# Altium PCB PCB1.PcbDoc
Units mm, origin at the board's own origin, x right, y up, seen from the top; angles counter-clockwise.
Board outline 152.4 x 101.6 mm, 2 copper layers (Top Layer, Bottom Layer); 50 components, 36 nets, 158 pads, 20 vias.
Unrouted connection lines stored in the file: 1.
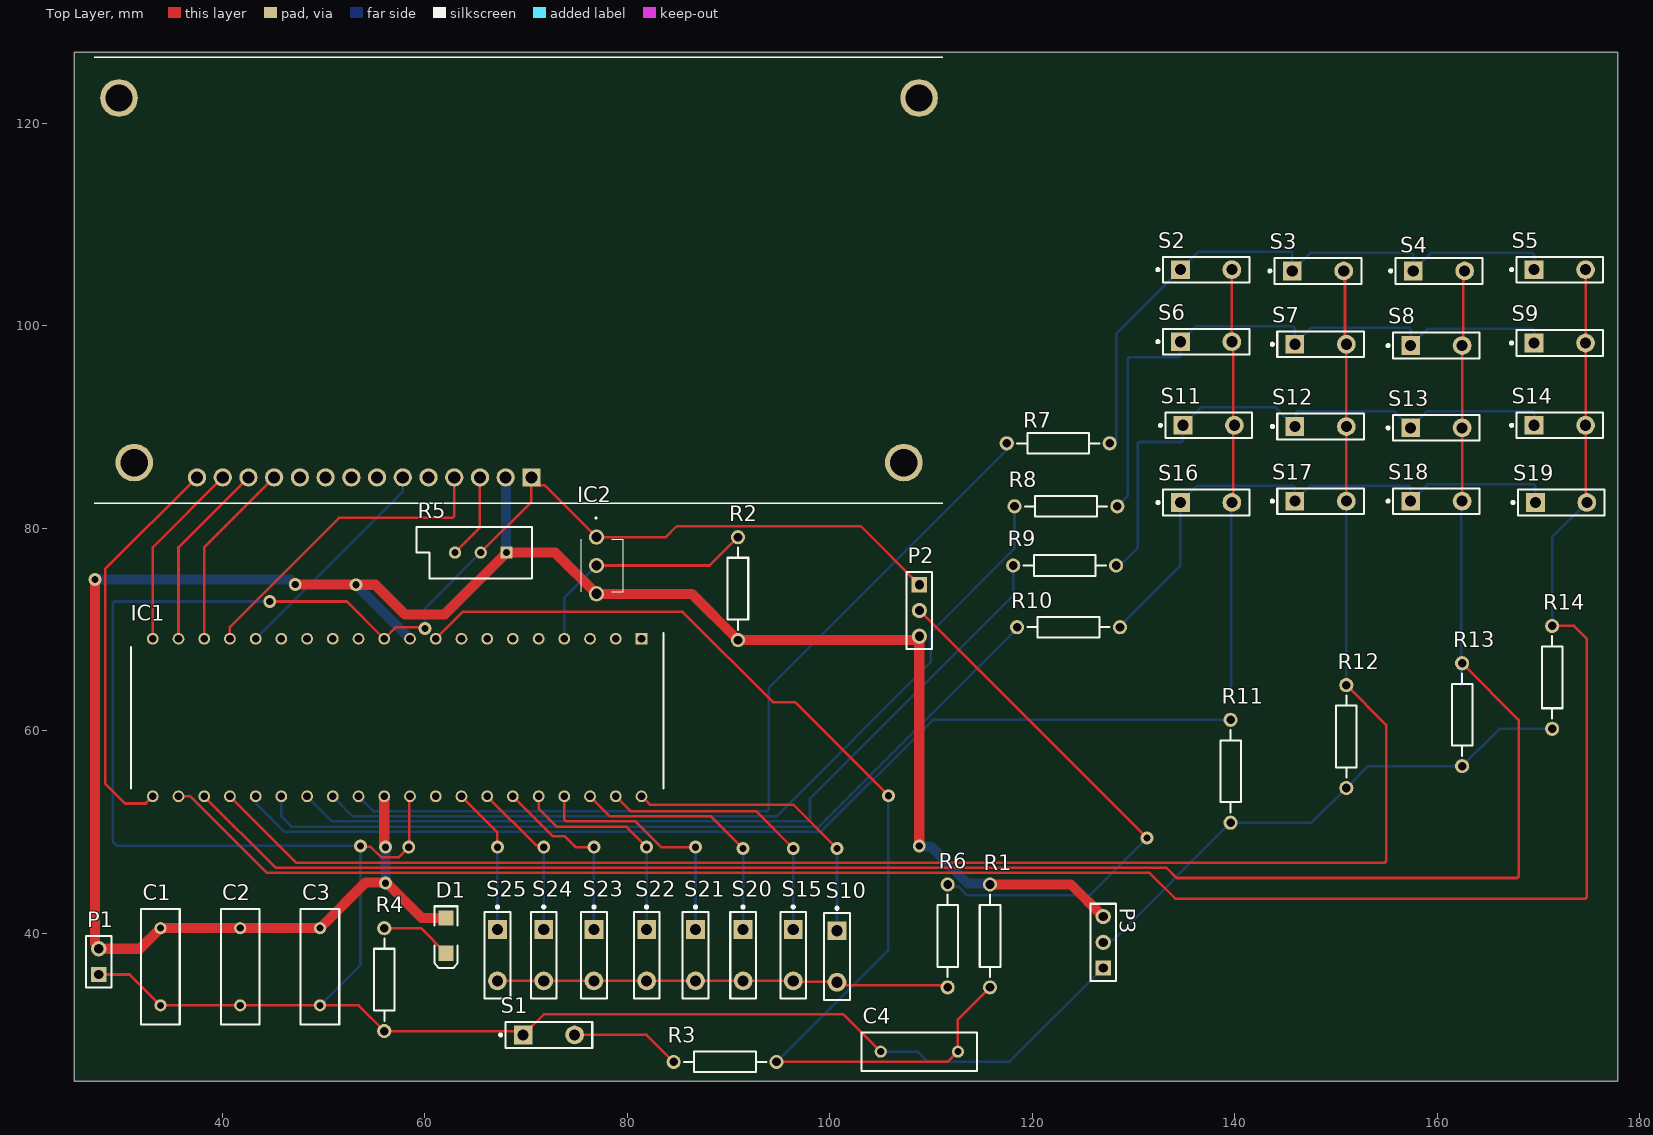
[diagram p0: Top Layer view]
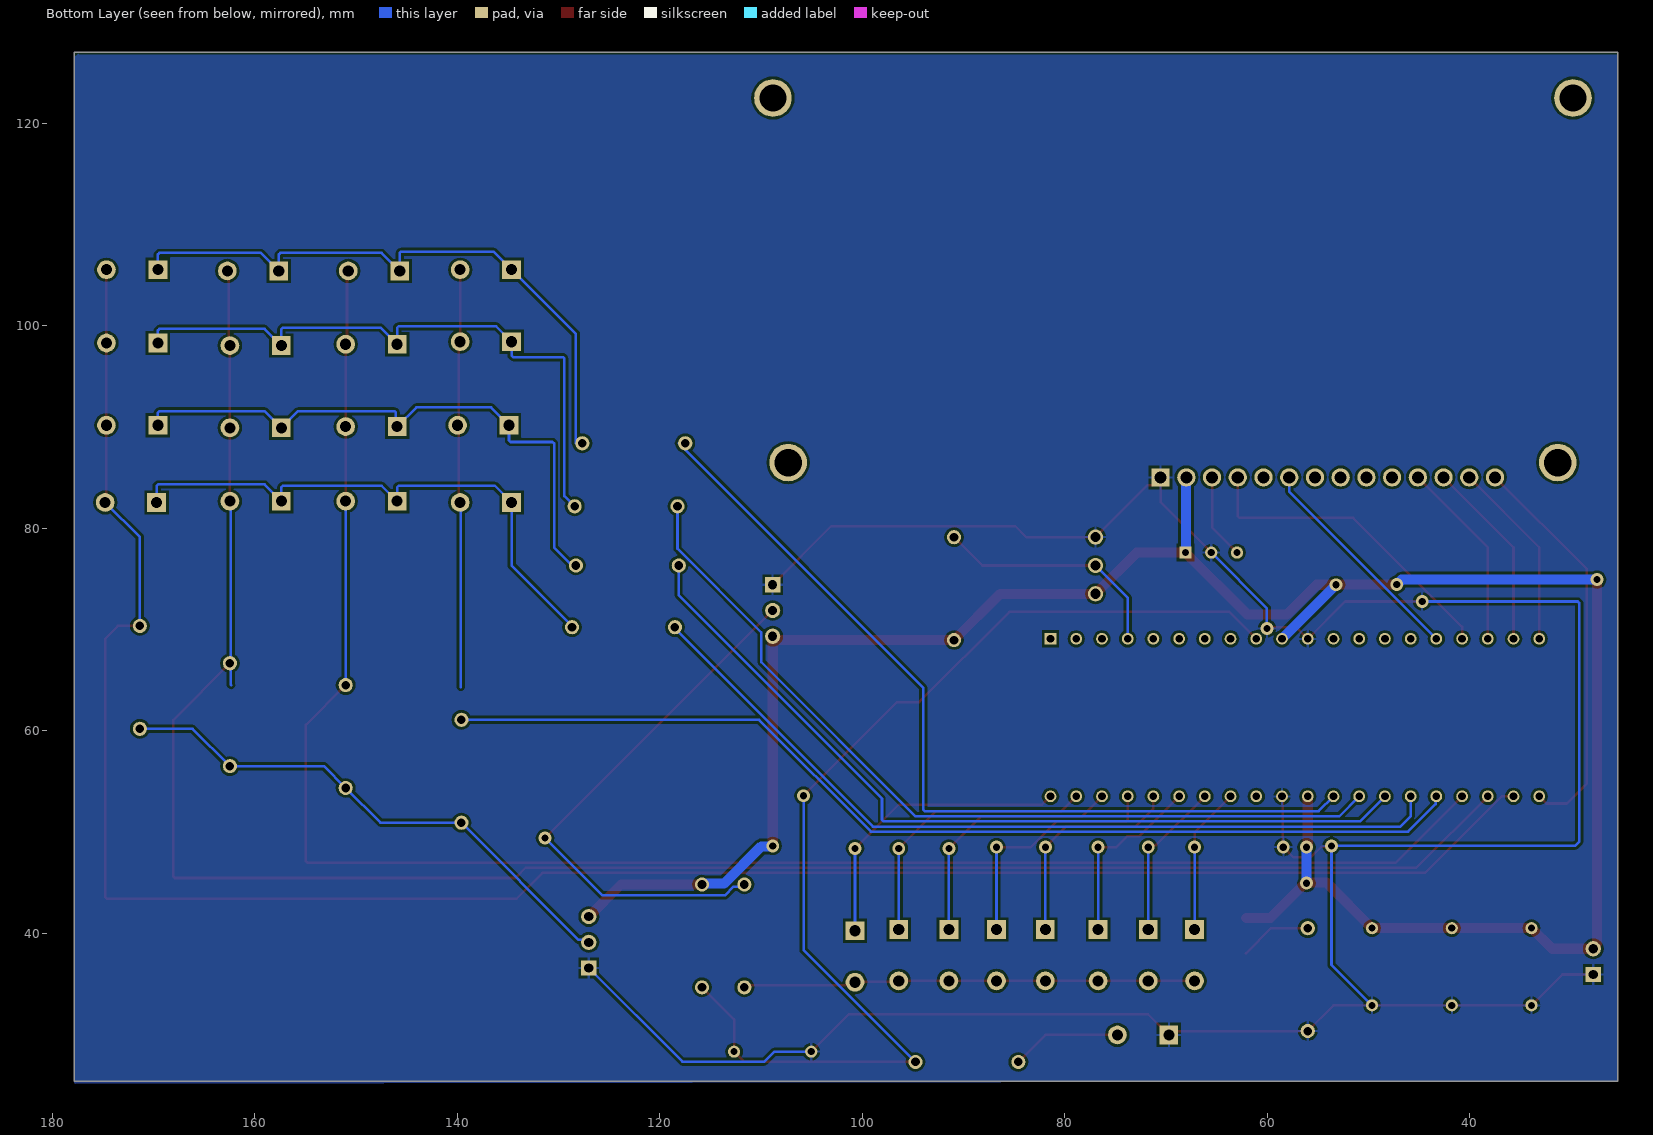
[diagram p1: Bottom Layer view, seen from below]

## Layer stack, top to bottom
Top Solder: solder mask 0.0102, Solder Resist, Dk 3.5
Top Layer: signal copper 0.0356
Dielectric 1: dielectric 0.32, FR-4, Dk 4.8
Bottom Layer: signal copper 0.0356
Bottom Solder: solder mask 0.0102, Solder Resist, Dk 3.5

## Board outline
25.4,25.4 177.8,25.4 177.8,127 25.4,127

## Design rules (kind name [scope] priority, off if disabled: settings)
Clearance [All] p1: gap=0.254 ignorepadtopadclearanceinfootprint=FALSE except(0: Arc-Hole Track-Hole SMDPad-Hole THPad-Hole Via-Hole Fill-Hole Poly-Hole Region-Hole Text-Hole)
PolygonConnect [All] p1: connectstyle=Relief reliefconductorwidth=0.254 reliefentries=4 polygonreliefangle="90 Angle" airgapwidth=0.254
RoutingVias [All] p1: holewidth=0.711 width=1.27 viastyle="Through Hole" minholewidth=0.711 minwidth=1.27 maxholewidth=0.711 maxwidth=1.27
SolderMaskExpansion [All] p1: expansion=0.102 istentingtop=FALSE
Width vcc [InNet('VCC')] p1: maxlimit=1 minlimit=1 preferedwidth=1
Width [All] p2: maxlimit=0.254 minlimit=0.254 preferedwidth=0.254
30 further rules are at their usual default settings.

## Classes and differential pairs
component class ATMEGA16L-8PI: C1 C2 C3 C4 D1 IC1 IC2 P1 P2 R1 R2 R3 R4 R5 R6 R7 R8 R9 R10 R12 R13 R14 S1 S2 S3 S4 S5 S6 S7 S8 S9 S10 S11 S12 S13 S14 S15 S16 S17 S18 S19 S20 S21 S22 S23 S24 S25

## Components (designator, comment, footprint, x,y, rotation, side; value= is the part's Value field where it differs from the comment)
C1 "Cap" RAD-0.3 33.909,36.703 r90 top value=100pF
C2 "Cap" RAD-0.3 41.783,36.703 r90 top value=100pF
C3 "Cap" RAD-0.3 49.657,36.703 r90 top value=100pF
C4 "Cap" RAD-0.3 108.839,28.321 r0 top value=100pF
D1 "LED2" 3.2X1.6X1.1 62.103,39.779 r270 top
DS1 "LM016L" LCD_LM016L 70.535,85.027 r0 top
IC1 "ATMEGA16L-8PI" DIP1556W56P254L5232H483Q40N 57.277,61.309 r270 top
IC2 "DS18B20+T&R" DS18B20TR 76.962,79.127 r270 top
P1 "Header 2" HDR1X2 27.813,35.941 r90 top
P2 "Header 3" HDR1X3 108.839,74.422 r270 top
P3 "Header 3" HDR1X3 127,36.576 r90 top
R1 "Res2" AXIAL-0.4 115.824,39.751 r90 top value=1K
R2 "Res2" AXIAL-0.4 90.932,74.041 r270 top value=1K
R3 "Res2" AXIAL-0.4 89.662,27.305 r180 top value=1K
R4 "Res2" AXIAL-0.4 56.007,35.433 r270 top value=1K
R5 "RPot" VR5 65.532,77.597 r180 top value=1K
R6 "Res2" AXIAL-0.4 111.633,39.751 r90 top value=1K
R7 "Res2" AXIAL-0.4 122.555,88.392 r180 top value=1K
R8 "Res2" AXIAL-0.4 123.317,82.169 r180 top value=1K
R9 "Res2" AXIAL-0.4 123.19,76.327 r180 top value=1K
R10 "Res2" AXIAL-0.4 123.571,70.231 r180 top value=1K
R11 "Res2" AXIAL-0.4 139.573,56.007 r90 top value=1K
R12 "Res2" AXIAL-0.4 151.003,59.436 r90 top value=1K
R13 "Res2" AXIAL-0.4 162.433,61.595 r90 top value=1K
R14 "Res2" AXIAL-0.4 171.323,65.278 r90 top value=1K
S1 "SW-PB" SPST-2 72.263,29.972 r0 top
S2 "SW-PB" SPST-2 137.16,105.537 r0 top
S3 "SW-PB" SPST-2 148.209,105.41 r0 top
S4 "SW-PB" SPST-2 160.147,105.41 r0 top
S5 "SW-PB" SPST-2 172.085,105.537 r0 top
S6 "SW-PB" SPST-2 137.16,98.425 r0 top
S7 "SW-PB" SPST-2 148.463,98.171 r0 top
S8 "SW-PB" SPST-2 159.893,98.044 r0 top
S9 "SW-PB" SPST-2 172.085,98.298 r0 top
S10 "SW-PB" SPST-2 100.711,37.719 r270 top
S11 "SW-PB" SPST-2 137.414,90.17 r0 top
S12 "SW-PB" SPST-2 148.463,90.043 r0 top
S13 "SW-PB" SPST-2 159.893,89.916 r0 top
S14 "SW-PB" SPST-2 172.085,90.17 r0 top
S15 "SW-PB" SPST-2 96.393,37.846 r270 top
S16 "SW-PB" SPST-2 137.16,82.55 r0 top
S17 "SW-PB" SPST-2 148.463,82.677 r0 top
S18 "SW-PB" SPST-2 159.893,82.677 r0 top
S19 "SW-PB" SPST-2 172.212,82.55 r0 top
S20 "SW-PB" SPST-2 91.44,37.846 r270 top
S21 "SW-PB" SPST-2 86.741,37.846 r270 top
S22 "SW-PB" SPST-2 81.915,37.846 r270 top
S23 "SW-PB" SPST-2 76.708,37.846 r270 top
S24 "SW-PB" SPST-2 71.755,37.846 r270 top
S25 "SW-PB" SPST-2 67.183,37.846 r270 top

## Footprints (in the part's own frame and the unit in brackets; to place one, negate y for a bottom-side part, rotate by r counter-clockwise, add the part's x,y. Pads: shape width x height; smd on the part's side, far side on the other; paste and mask are expansions set on the pad)
3.2X1.6X1.1 [mm] "SMT LED; 2 Flat Leads"
  rect 1.5x1.5 smd: 1(-1.75,0) 2(1.75,0)
  silkscreen extent -2.9,-1.15 3.2,1.15
AXIAL-0.4 [mm] "Axial Device, Thru-Hole; 2 Leads; 0.4 in Pin Spacing"
  round 1.4 hole 0.85: 1(-5.08,0) 2(5.08,0)
  silkscreen extent -4.06,-1.02 4.06,1.02
DIP1556W56P254L5232H483Q40N [mm]
  rect 1.159x1.159 hole 0.759: 1(-7.779,24.13)
  round 1.159 hole 0.759: 2(-7.779,21.59) 3(-7.779,19.05) 4(-7.779,16.51) 5(-7.779,13.97) 6(-7.779,11.43) 7(-7.779,8.89) 8(-7.779,6.35) 9(-7.779,3.81) 10(-7.779,1.27) 11(-7.779,-1.27) 12(-7.779,-3.81) 13(-7.779,-6.35) 14(-7.779,-8.89) 15(-7.779,-11.43) 16(-7.779,-13.97) 17(-7.779,-16.51) 18(-7.779,-19.05) 19(-7.779,-21.59) 20(-7.779,-24.13) 21(7.779,-24.13) 22(7.779,-21.59) 23(7.779,-19.05) 24(7.779,-16.51) 25(7.779,-13.97) 26(7.779,-11.43) 27(7.779,-8.89) 28(7.779,-6.35) 29(7.779,-3.81) 30(7.779,-1.27) 31(7.779,1.27) 32(7.779,3.81) 33(7.779,6.35) 34(7.779,8.89) 35(7.779,11.43) 36(7.779,13.97) 37(7.779,16.51) 38(7.779,19.05) 39(7.779,21.59) 40(7.779,24.13)
  silkscreen extent -8.36,-26.29 6.99,26.29, body extent -7.92,-26.16 7.92,26.16, height 4.83
DS18B20TR [mm]
  round 1.512 hole 1.008: 1(0,0) 2(2.8,0) 3(5.6,0)
  silkscreen extent -1.95,-1.5 5.41,2.66, body extent -0.4,-1.53 6,2.66, height 10.51
HDR1X2 [mm] "Connector; Header; 2 Position"
  rect 1.5x1.5 hole 0.9: 1(0,0)
  round 1.5 hole 0.9: 2(2.54,0)
  silkscreen extent -1.27,-1.27 3.81,1.27
HDR1X3 [mm] "Connector; Header; 3 Position"
  rect 1.5x1.5 hole 0.9: 1(0,0)
  round 1.5 hole 0.9: 2(2.54,0) 3(5.08,0)
  silkscreen extent -1.27,-1.27 6.35,1.27
LCD_LM016L [mm]
  rect 1.8x1.8 hole 1.2: 1(0,0)
  round 1.8 hole 1.2: 2(-2.54,0) 3(-5.08,0) 4(-7.62,0) 5(-10.16,0) 6(-12.7,0) 7(-15.24,0) 8(-17.78,0) 9(-20.32,0) 10(-22.86,0) 11(-25.4,0) 12(-27.94,0) 13(-30.48,0) 14(-33.02,0)
  round 3.716 hole 2.7: 15(36.78,1.46) 16(-39.22,1.46) 17(-40.72,37.46) 18(38.28,37.46)
  silkscreen extent -43.18,-2.54 40.64,41.46
RAD-0.3 [mm] "Radial Cap, Thru-Hole; 2 Leads; 0.3 in Pin Spacing"
  round 1.2 hole 0.7: 1(-3.81,0) 2(3.81,0)
  silkscreen extent -5.71,-1.91 5.71,1.91
SPST-2 [mm] "Switch; 2 Leads"
  rect 1.85x1.85 hole 1.1: 1(-2.54,0)
  round 1.85 hole 1.1: 2(2.54,0)
  silkscreen extent -4.89,-1.27 4.28,1.27
VR5 [mm] "Thru-Hole; 3 Leads"
  rect 1.2x1.2 hole 0.7: 1(-2.54,0)
  round 1.2 hole 0.7: 2(0,0) 3(2.54,0)
  silkscreen extent -5.08,-2.54 6.35,2.54

## Part data
C1 C2 C3 C4: "Capacitor", LatestRevisionDate=17-Jul-2002, LatestRevisionNote="Re-released for DXP Platform.", PackageDescription="Radial Cap, Thru-Hole; 2 Leads; 0.3 in Pin Spacing", PackageReference=RAD-0.3, Published=8-Jun-2000, Publisher="Altium Limited"
D1: "Typical RED, GREEN, YELLOW, AMBER GaAs LED", LatestRevisionDate=17-Jul-2002, LatestRevisionNote="Re-released for DXP Platform.", PackageDescription="SM LED; 2 Flat Leads", PackageReference=3.2X1.6X1.1, PackageVersion=Feb-2002, Published=8-Jun-2000, Publisher="Altium Limited"
DS1: "Display Lcd 35x75mm", Package=None, Availability=Unavailable, MF=Hitachi, MP=LM016L, Price=None, SnapEDA_Link=https://www.snapeda.com/parts/LM016L/Hitachi/view-part/229734/?ref=snap
IC1: "Integrated Circuit", Manufacturer_Name=Microchip, Mouser Part Number=556-ATMEGA16L-8PI, Datasheet Link=http://www.microchip.com/mymicrochip/filehandler.aspx?ddocname=en590660, Height=4.826mm, Manufacturer_Part_Number=ATMEGA16L-8PI, Mouser Price/Stock=https://www.mouser.co.uk/ProductDetail/Microchip-Technology-Atmel/ATmega16L-8PI?qs=aqrrBurbvGfoTGm9tGS2ew%3D%3D
IC2: "Integrated Circuit", Manufacturer_Name="Maxim Integrated", Mouser Part Number=700-DS18B20T&R, Datasheet Link=https://componentsearchengine.com/Datasheets/1/DS18B20+T&R.pdf, Height=10.41mm, Manufacturer_Part_Number=DS18B20+T&R, Mouser Price/Stock=https://www.mouser.co.uk/ProductDetail/Maxim-Integrated/DS18B20%2bTR?qs=7H2Jq%252ByxpJKpIDCbiq4lfg%3D%3D
P1: "Header, 2-Pin", LatestRevisionDate=17-Jul-2002, LatestRevisionNote="Re-released for DXP Platform.", Publisher="Altium Limited"
P2 P3: "Header, 3-Pin", LatestRevisionDate=17-Jul-2002, LatestRevisionNote="Re-released for DXP Platform.", Publisher="Altium Limited"
R1 R2 R3 R4 R6 R7 R8 R9 R10 R11 R12 R13 R14: "Resistor", LatestRevisionDate=17-Jul-2002, LatestRevisionNote="Re-released for DXP Platform.", PackageDescription="Axial Device, Thru-Hole; 2 Leads; 0.4 in Pin Spacing", PackageReference=AXIAL-0.4, Published=8-Jun-2000, Publisher="Altium Limited"
R5: "Potentiometer", LatestRevisionDate=17-Jul-2002, LatestRevisionNote="Re-released for DXP Platform.", PackageDescription="Variable Resistor, Thru-Hole; 3 Leads", PackageReference=VR5, Published=8-Jun-2000, Publisher="Altium Limited", Set Position=0.5, Sim Note="Enter the Resistance value and the set point into parameter fields."
S1 S2 S3 S4 S5 S6 S7 S8 S9 S10 S11 S12 S13 S14 S15 S16 S17 S18 S19 S20 S21 S22 S23 S24 S25: "Switch", LatestRevisionDate=17-Jul-2002, LatestRevisionNote="Re-released for DXP Platform.", PackageDescription="Switch; 2 Leads", PackageReference=SPST-2, Published=24-Mar-1999, Publisher="Altium Limited"

## Via types
v1: diameter 1.27, hole 0.711, Top Layer to Bottom Layer, 20 vias

## Nets (pads, with @x,y where several pads share a name; then routed paths per layer and width w, separated by ;. In a path a pad name is that pad's centre, name@x,y a point inside that pad or via, vN(x,y) a via of type N, cw(c..) or ccw(c..) an arc to the next point about the centre after c; other vN are vias at no path point)
GND: C1.1 C2.1 C3.1 C4.1 DS1.1 IC1.11 IC1.31 IC2.1 P1.1 P2.1 P3.1 R4.2 R5.2 S1.1 | length 280.6
  Top Layer w0.254: P1.1 30.861,35.941 C1.1 C2.1 C3.1 53.467,32.893 R4.2 69.342,30.353 S1.1 71.755,32.004 101.346,32.004 C4.1 ; v1(44.704,72.771) 52.324,72.771 IC1.11 57.15,70.231 59.915,70.231 v1(60.034,70.112) ; v1(53.658,48.641) 53.762,48.537 54.674,48.537 55.713,47.498 57.404,47.498 v1(58.42,48.514) 58.483,48.578 58.483,53.467 IC1.31 ; R5.2 70.535,82.6 DS1.1 71.308,84.254 71.835,84.254 IC2.1 83.804,79.127 84.879,80.202 103.059,80.202 P2.1
  Bottom Layer w0.254: v1(44.704,72.771) 44.577,72.898 44.323,72.644 44.323,72.683 44.235,72.771 29.359,72.771 29.21,72.622 29.21,49.044 29.613,48.641 v1(53.658,48.641) 53.658,36.894 C3.1 ; v1(60.034,70.112) 60.034,72.099 R5.2 ; C4.1 108.68,28.321 109.661,27.34 117.764,27.34 P3.1
NetD1_2: D1.2 R4.1 | length 7.1
  Top Layer w0.254: R4.1 59.619,40.513 D1.2
NetDS1_3: DS1.3 R5.3 | length 8.5
  Top Layer w0.254: R5.3 65.455,80.06 DS1.3
NetP2_2: P2.2 R6.2 | length 54.3
  Top Layer w0.254: P2.2 v1(131.318,49.403)
  Bottom Layer w0.254: R6.2 111.852,44.612 112.689,44.612 113.551,43.75 125.665,43.75 v1(131.318,49.403)
NetP3_2: P3.2 R11.1 R12.1 R13.1 R14.1 | length 53.1
  Bottom Layer w0.254: P3.2 127.238,39.354 128,39.354 R11.1 147.574,50.927 R12.1 153.162,56.515 R13.1 166.116,60.198 R14.1
NetR3_2: R3.2 S1.2 | length 10.9
  Top Layer w0.254: S1.2 81.915,29.972 R3.2
NetR6_1: R6.1 S10.2 S15.2 S20.2 S21.2 S22.2 S23.2 S24.2 S25.2 | length 44.7
  Top Layer w0.254: S25.2 S24.2 S23.2 S22.2 S21.2 S20.2 S15.2 96.456,35.242 100.647,35.242 S10.2 101,34.89 111.414,34.89 R6.1
NetR7_1: R7.1 S2.1 S3.1 S4.1 S5.1 | length 62
  Bottom Layer w0.254: R7.1@128.27,88.392 128.27,99.187 S2.1 136.398,107.315 145.52,107.315 145.669,107.166 S3.1 147.447,107.188 157.458,107.188 157.607,107.039 S4.1 159.385,107.188 169.396,107.188 169.545,107.039 S5.1
NetR8_1: R8.1 S6.1 S7.1 S8.1 S9.1 | length 63.3
  Bottom Layer w0.254: R8.1 129.413,83.185 129.413,96.752 129.562,96.901 134.471,96.901 134.62,97.05 S6.1 136.144,99.949 145.774,99.949 145.923,99.8 S7.1 147.574,99.822 157.204,99.822 157.353,99.673 S8.1 159.004,99.695 169.396,99.695 169.545,99.546 S9.1
NetR9_1: R9.1 S11.1 S12.1 S13.1 S14.1 | length 59.1
  Bottom Layer w0.254: R9.1@128.651,76.327 130.429,78.105 130.429,88.37 130.578,88.519 134.725,88.519 134.874,88.668 S11.1 136.652,91.948 144.018,91.948 S12.1 146.05,90.17 146.05,91.418 146.199,91.567 155.702,91.567 S13.1 159.004,91.567 169.396,91.567 169.545,91.418 S14.1
NetR10_1: R10.1 S16.1 S17.1 S18.1 S19.1 | length 55.3
  Bottom Layer w0.254: R10.1@128.905,70.612 134.62,76.327 S16.1 136.271,84.201 145.774,84.201 145.923,84.052 S17.1 147.447,84.201 157.204,84.201 157.353,84.052 S18.1 159.004,84.328 169.523,84.328 169.672,84.179 169.672,83.312 S19.1@169.545,83.185
PA0: IC1.40 S10.1 | length 29.6
  Top Layer w0.254: IC1.40 82.232,52.705 96.393,52.705 v1(100.711,48.387)
  Bottom Layer w0.254: S10.1 v1(100.711,48.387)
PA1: IC1.39 S15.1 | length 27.7
  Top Layer w0.254: IC1.39 80.327,52.07 92.71,52.07 v1(96.393,48.387)
  Bottom Layer w0.254: S15.1 v1(96.393,48.387)
PA2: IC1.38 S20.1 | length 25.2
  Top Layer w0.254: IC1.38 78.295,51.562 88.265,51.562 v1(91.44,48.387)
  Bottom Layer w0.254: S20.1 v1(91.44,48.387)
PA3: IC1.37 S21.1 | length 24.5
  Top Layer w0.254: IC1.37 73.787,51.203 73.936,51.054 80.812,51.054 83.352,48.514 v1(86.741,48.514)
  Bottom Layer w0.254: S21.1 v1(86.741,48.514)
PA4: IC1.36 S22.1 | length 21.6
  Top Layer w0.254: IC1.36 71.247,52.324 73.025,50.546 79.883,50.546 v1(81.915,48.514)
  Bottom Layer w0.254: S22.1 v1(81.915,48.514)
PA5: IC1.35 S23.1 | length 18.2
  Top Layer w0.254: IC1.35 71.915,50.322 72.635,49.602 73.816,49.602 74.905,48.514 v1(76.708,48.514)
  Bottom Layer w0.254: S23.1 v1(76.708,48.514)
PA6: IC1.34 S24.1 | length 15.8
  Top Layer w0.254: IC1.34 70.989,48.708 71.561,48.708 v1(71.755,48.514)
  Bottom Layer w0.254: S24.1 v1(71.755,48.514)
PA7: IC1.33 S25.1 | length 14.6
  Top Layer w0.254: IC1.33 67.183,49.974 v1(67.183,48.514)
  Bottom Layer w0.254: S25.1 v1(67.183,48.514)
PB3: IC1.4 IC2.2 R2.1 | length 23.7
  Top Layer w0.254: IC2.2 88.138,76.327 R2.1
  Bottom Layer w0.254: IC1.4 73.787,73.152 IC2.2
PC0: IC1.22 R14.2 S5.2 S9.2 S14.2 S19.2 | length 208.7
  Top Layer w0.254: IC1.22 36.869,53.53 44.425,45.974 131.572,45.974 134.112,43.434 174.603,43.434 174.752,43.583 174.752,69.088 173.482,70.358 R14.2 ; S19.2@174.625,83.185 S14.2 S9.2 S5.2
  Bottom Layer w0.254: R14.2 171.323,79.121 S19.2
PC1: IC1.23 R13.2 S4.2 S8.2 S13.2 S18.2 | length 197.8
  Top Layer w0.254: IC1.23 45.275,46.482 133.223,46.482 134.239,45.466 167.872,45.466 168.021,45.615 168.021,61.087 R13.2 ; R13.2@162.306,66.294 R13.2@162.369,66.358 ; S18.2@162.369,82.614 S18.2 S13.2 S8.2 162.56,98.171 162.56,105.283 S4.2
  Bottom Layer w0.254: 162.306,64.516 162.369,64.579 162.369,82.614 S18.2
PC2: IC1.24 R12.2 S3.2 S7.2 S12.2 S17.2 | length 177
  Top Layer w0.254: IC1.24 47.307,46.99 154.791,46.99 154.94,47.139 154.94,60.579 R12.2 ; S3.2 150.876,105.283 150.876,98.298 S7.2 S12.2 S17.2
  Bottom Layer w0.254: R12.2 S17.2
PC3: IC1.25 R11.2 S2.2 S6.2 S11.2 S16.2 | length 144.3
  Top Layer w0.254: S16.2@139.636,82.486 S16.2 139.827,82.677 139.827,90.043 S11.2 139.827,90.297 139.827,98.298 S6.2 S2.2
  Bottom Layer w0.254: IC1.25 43.383,53.454 43.383,52.756 46.101,50.038 99.143,50.038 110.192,61.087 R11.2 ; R11.2@139.573,60.706 R11.2@139.636,60.77 ; 139.636,64.325 139.636,82.486 S16.2
PC4: IC1.26 R10.2 | length 83.5
  Bottom Layer w0.254: IC1.26 45.847,51.562 46.863,50.546 98.933,50.546 R10.2@118.745,70.358
PC5: IC1.27 R9.2 | length 84.2
  Bottom Layer w0.254: IC1.27 50.863,51.054 97.895,51.054 98.044,51.203 98.044,53.312 118.11,73.378 R9.2
PC6: IC1.28 R8.2 | length 85
  Bottom Layer w0.254: IC1.28 52.895,51.562 94.742,51.562 109.97,66.79 109.97,69.716 118.237,77.983 R8.2
PC7: IC1.29 R7.2 | length 87.3
  Bottom Layer w0.254: IC1.29 54.927,52.07 93.831,52.07 93.98,52.219 93.98,64.262 R7.2@118.11,88.392
PD2: DS1.6 IC1.16 | length 22
  Bottom Layer w0.254: IC1.16 57.835,83.616 DS1.6
PD3: DS1.4 IC1.17 | length 31.7
  Top Layer w0.254: IC1.17 40.767,70.271 51.522,81.026 62.766,81.026 62.915,81.175 DS1.4
PD4: DS1.11 IC1.18 | length 18.8
  Top Layer w0.254: IC1.18 38.227,78.119 DS1.11
PD5: DS1.12 IC1.19 | length 18.8
  Top Layer w0.254: IC1.19 35.687,78.119 DS1.12
PD6: DS1.13 IC1.20 | length 18.8
  Top Layer w0.254: IC1.20 33.147,78.119 DS1.13
PD7: DS1.14 IC1.21 | length 39.8
  Top Layer w0.254: IC1.21 32.441,52.824 30.425,52.824 28.448,54.801 28.448,75.96 DS1.14
RESET: C4.2 IC1.9 R1.1 R3.1 | length 110.2
  Top Layer w0.254: IC1.9 63.754,71.755 85.471,71.755 94.391,62.835 96.55,62.835 v1(105.791,53.594) ; R3.1 111.633,27.305 C4.2 112.649,31.496 R1.1
  Bottom Layer w0.254: R3.1 105.791,38.354 v1(105.791,53.594)
VCC: C1.2 C2.2 C3.2 D1.1 DS1.2 IC1.10 IC1.30 IC2.3 P1.2 P2.3 P3.3 R1.2 R2.2 R5.1 | length 229.1
  Top Layer w1: v1(27.432,74.93) 27.432,38.997 27.813,38.616 P1.2 31.877,38.481 C1.2 C2.2 C3.2 54.177,45.033 56.059,45.033 v1(56.134,44.958) ; v1@47.117,74.549 v1(47.224,74.442) 47.234,74.432 53.203,74.432 v1(53.213,74.422) 55.118,74.422 58.039,71.501 61.976,71.501 R5.1 72.892,77.597 IC2.3 86.366,73.527 R2.2 P2.3@108.323,68.961 ; IC1.30 56.007,48.714 56.134,48.587 v1(56.134,48.514) ; v1@56.082,45.033 56.134,45.085 59.69,41.529 D1.1 ; v1(108.839,48.641) P2.3 ; R1.2 123.825,44.831 P3.3
  Bottom Layer w1: v1(27.432,74.93) 46.736,74.93 v1(47.224,74.442) ; v1(53.213,74.422) IC1.10 ; v1(56.134,44.958) v1(56.134,48.514) ; DS1.2 68.034,84.988 68.034,77.635 R5.1 ; v1(108.839,48.641) 108.891,48.589 109.957,48.589 113.639,44.908 115.747,44.908 R1.2
pads on no net: DS1.5 DS1.7 DS1.8 DS1.9 DS1.10 DS1.15 DS1.16 DS1.17 DS1.18 IC1.1 IC1.2 IC1.3 IC1.5 IC1.6 IC1.7 IC1.8 IC1.12 IC1.13 IC1.14 IC1.15 IC1.32

## Polygon pours and split planes (outlines as drawn)
GND on Bottom Layer "GND_L02_P000" (solid, pour order 0): 25.4,25.4 25.4,126.746 177.292,126.746 177.419,126.873 177.8,126.492 177.8,25.146